# Altium PCB IMU.PcbDoc
Units mil, origin at the board's own origin, x right, y up, seen from the top; angles counter-clockwise.
Board outline 610 x 635 mil, 4 copper layers (Top Layer, GND, Signal Layer, Bottom Layer), stack 30.634 mil thick; 7 components, 10 nets, 36 pads, 10 vias.
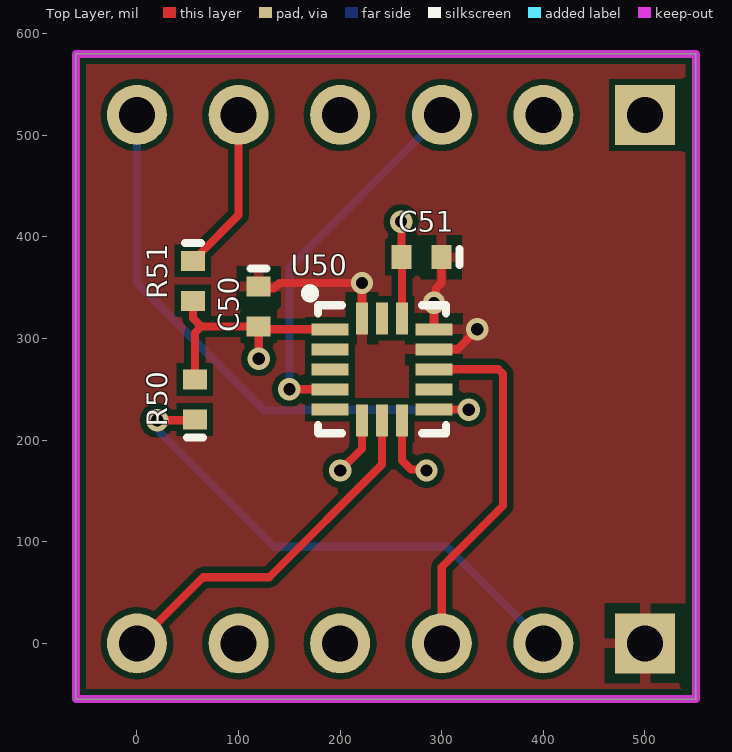
[diagram p0: Top Layer view]
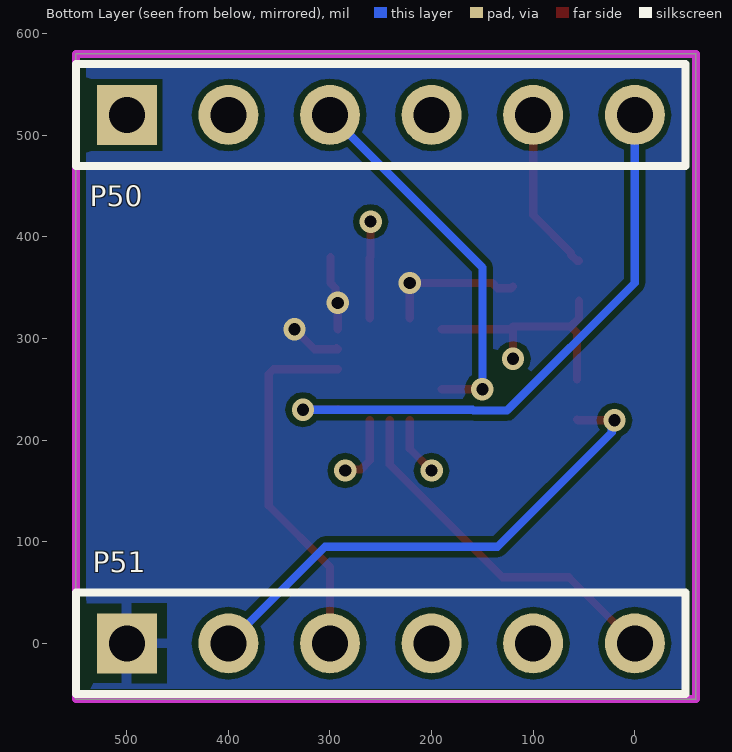
[diagram p1: Bottom Layer view, seen from below]
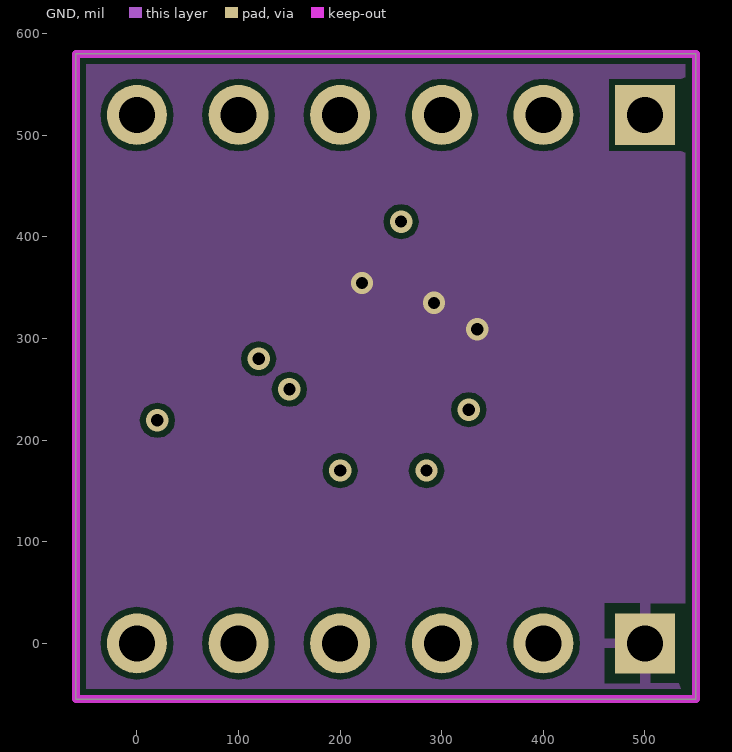
[diagram p2: GND]
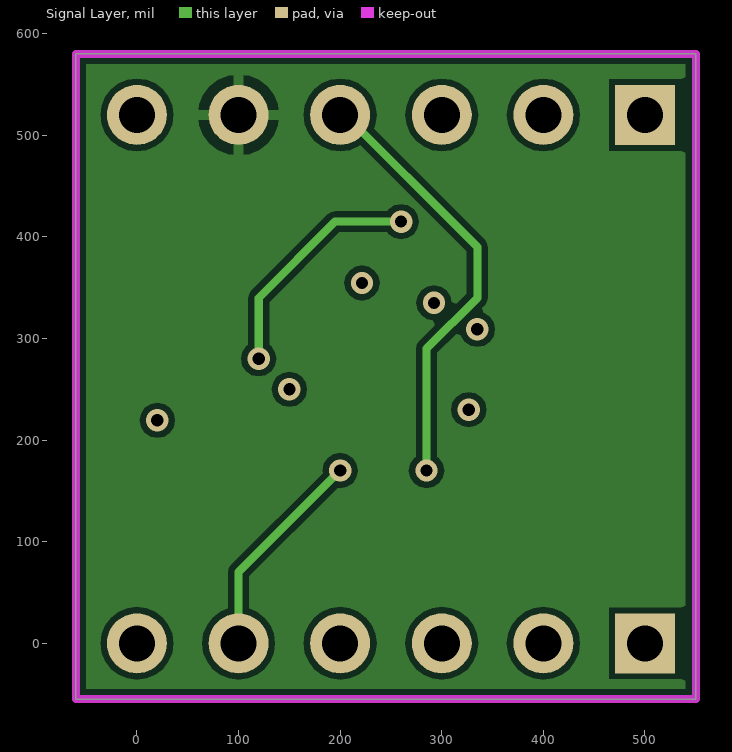
[diagram p3: Signal Layer]

## Layer stack, top to bottom
Top Solder: solder mask 0.4, Solder Resist, Dk 3.5
Top Layer: signal copper 1.4
Dielectric 1: core 10, FR-4, Dk 4.2
GND: signal copper 1.417
Dielectric 3: prepreg 5, Dk 4.2
Signal Layer: signal copper 1.417
Dielectric 2: core 10, Dk 4.2
Bottom Layer: signal copper 1.4
Bottom Solder: solder mask 0.4, Solder Resist, Dk 3.5

## Board outline
-60,-55 -60,580 550,580 550,-55

## Design rules (kind name [scope] priority, off if disabled: settings)
Clearance [All] p1: gap=6 ignorepadtopadclearanceinfootprint=FALSE
MinimumSolderMaskSliver [All] p1: minsoldermaskwidth=0
PolygonConnect [All] p1: thpad.connectstyle=Relief thpad.reliefconductorwidth=10 thpad.reliefentries=4 thpad.polygonreliefangle="90 Angle" thpad.airgapwidth=10 smdpad.connectstyle=Relief smdpad.reliefconductorwidth=10 smdpad.reliefentries=4 smdpad.polygonreliefangle="90 Angle" smdpad.airgapwidth=10 via.connectstyle=Direct via.reliefconductorwidth=10 via.reliefentries=4 via.polygonreliefangle="90 Angle" via.airgapwidth=10
RoomDefinition IMU [InComponentClass('IMU')] p1 off: confinementstyle=ConfineIn formatcopy=TRUE lockcomponents=FALSE outline 41.06,-68.94 41.06,658.94 568.94,658.94 568.94,-68.94
RoutingVias [All] p1: holewidth=9.84 width=19.68 viastyle="Through Hole" minholewidth=7.87 minwidth=17.72 maxholewidth=19.68 maxwidth=39.37
SilkToSilkClearance [All] p1: silktosilkclearance=0
SilkToSolderMaskClearance [IsPad] p1: minsilkscreentomaskgap=0 clearancetoexposedcopper=TRUE
SolderMaskExpansion [All] p1: expansion=4 istentingtop=FALSE
SupplyNets "Schematic Supply Nets_2" [InNet('VREG')] p1: voltage=0.000
SupplyNets "Schematic Supply Nets_1" [InNet('GND')] p2: voltage=0.000
SupplyNets "Schematic Supply Nets" [InNet('VDD')] p3: voltage=0.000
Width [All] p1: maxlimit=10 minlimit=6 preferedwidth=8 minimp=50.000000 maximp=50.000000 favimp=50.000000
27 further rules are at their usual default settings.

## Components (designator, comment, footprint, x,y, rotation, side; value= is the part's Value field where it differs from the comment)
C50 "Generic ceramic capacitor" 0402 119.83,331.47 r270 top value=0.1uF
C51 "Generic ceramic capacitor" 0402 280,380 r180 top value=0.1uF
P50 "Header 6" HDR1X6 500,520 r180 bottom
P51 "Header 6" HDR1X6 500,0 r180 bottom
R50 "Generic resistor" 0402 56.97,240 r90 top value=0
R51 "Generic resistor" 0402 55,356.79 r270 top value=DNP
U50 "ADXL362" ADXL362 241.18,269.68 r0 top

## Footprints (in the part's own frame and the unit in brackets; to place one, negate y for a bottom-side part, rotate by r counter-clockwise, add the part's x,y. Pads: shape width x height; smd on the part's side, far side on the other; paste and mask are expansions set on the pad)
0402 [mm] "Surface Mount; Body 1 x 0.5 mm (LxW typ)"
  rect 0.5x0.6 smd: 1(-0.5,0) 2(0.5,0)
  silkscreen extent -0.95,-0.2 -0.95,0.2, body extent -0.5,-0.25 0.5,0.25, height 0.5
ADXL362 [mm]
  rect 0.925x0.3 smd: 1(-1.3,1) 2(-1.3,0.5) 3(-1.3,0) 4(-1.3,-0.5) 5(-1.3,-1) 9(1.3,-1) 10(1.3,-0.5) 11(1.3,0) 12(1.3,0.5) 13(1.3,1)
  rect 0.3x0.8 smd: 6(-0.5,-1.275) 7(0,-1.275) 8(0.5,-1.275) 14(0.5,1.275) 15(0,1.275) 16(-0.5,1.275)
  silkscreen extent -1.9,-1.6 1.6,2, body extent -1.5,-1.5 1.5,1.5, height 1.14
HDR1X6 [mm] "Connector; Header; 6 Position"
  rect 1.5x1.5 hole 0.9: 1(0,0)
  round 1.5 hole 0.9: 2(2.54,0) 3(5.08,0) 4(7.62,0) 5(10.16,0) 6(12.7,0)
  silkscreen extent -1.27,-1.27 13.97,1.27

## Part data
C50 C51: library part C-0.1uF-10V-X5R-0402, "CAP CER 100nF/0.1UF 10V X5R 0402", Digi-Key Part Number=1276-1022-1-ND, Manufacturer="Samsung Electro-Mechanics", Manufacturer Part Number=CL05A104KP5NNNC, Rating="10V, -55C~85C", Tolerance=+-10%
P50 P51: "Header, 6-Pin", LatestRevisionDate=17-Jul-2002, LatestRevisionNote="Re-released for DXP Platform.", Publisher="Altium Limited"
R50: library part R-0-0.063W-*-0402, "RES 0 OHM JUMPER 1/16W 0402", Digi-Key Part Number=311-0.0JRCT-ND, Manufacturer=YAGEO, Manufacturer Part Number=RC0402JR-070RL, Rating=1/16W
R51: library part res, "Chip Resistor (Surface Mount)"
U50: "Analog Devices low power accelerometer", Digi-Key Part Number=505-ADXL362BCCZ-RLCT-ND, Manufacturer="Analog Devices Inc.", Manufacturer Part Number=ADXL362BCCZ-RL, Rating="1.6~3.5V, -40~85C"

## Via types
v1: diameter 22, hole 12, Top Layer to Bottom Layer, tented both sides, 10 vias

## Nets (pads, with @x,y where several pads share a name; then routed paths per layer and width w, separated by ;. In a path a pad name is that pad's centre, name@x,y a point inside that pad or via, vN(x,y) a via of type N, cw(c..) or ccw(c..) an arc to the next point about the centre after c; other vN are vias at no path point)
CS: P50.4 U50.8 | length 506.5
  Top Layer w8: U50.8 260.87,180 269.67,171.2 283.8,171.2 v1(285,170)
  Signal Layer w8: P50.4@195,530 335,390 335,340 285,290 v1(285,170)
GND: C50.1 C51.1 P51.1 U50.12 U50.13 U50.16 | length 265.6
  Top Layer w8: C50.1 121.56,349.42 135,349.42 140.22,354.64 v1(221.5,354.64) U50.16 ; U50.13 v1(292.36,335) 294.47,337.1 294.47,349.42 299.69,354.64 C51.1 ; U50.12@293.43,290.44 U50.12 315.31,289.37 v1(335,309.06)
INT1: P51.3 U50.11 | length 359.9
  Top Layer w8: U50.11 355.63,269.69 360.31,265 360.31,135.32 300,75 P51.3
INT2: P50.6 U50.9 | length 578.7
  Top Layer w8: U50.9 292.57,230.11 326.37,230.11 v1(326.58,229.9)
  Bottom Layer w8: P50.6 0,354.64 125.64,229 158.7,229 159.6,229.9 v1(326.58,229.9)
MISO: P51.6 U50.7 | length 357.6
  Top Layer w8: P51.6 65,65 130.22,65 241.18,175.96 U50.7
MOSI: P51.5 U50.6 | length 269.8
  Top Layer w8: v1(200,170) 221.5,191.5 U50.6
  Signal Layer w8: P51.5 100,70 v1(200,170)
NetC50_2: C50.2 C51.2 R50.2 R51.2 U50.1 U50.14 | length 569.7
  Top Layer w8: R51.2 55,319.88 63.1,311.78 ; R50.2 56.97,305.65 63.1,311.78 ; v1(119.83,280) C50.2 ; U50.1 122.55,309.06 C50.2 ; v1(260,415) 260.31,414.69 C51.2 260.87,379.45 U50.14 ; 63.1,311.78 C50.2
  Signal Layer w8: v1(119.83,280) 119.83,339.83 195,415 v1(260,415)
SCLK: P50.3 U50.4 | length 372.1
  Top Layer w8: v1(150,250) U50.4
  Bottom Layer w8: v1(150,250) 150,370 P50.3
VDD: P50.5 R51.1 | length 163.3
  Top Layer w8: R51.1 56.97,376.47 62.81,382.32 62.81,384.29 100,421.48 P50.5
VREG: P51.2 R50.1 | length 513.8
  Top Layer w8: v1(20,219.49) 56.14,219.49 R50.1
  Bottom Layer w8: v1(20,219.49) 22.68,216.81 22.68,207.32 135,95 305,95 P51.2
pads on no net: P50.1 P50.2 P51.4 U50.2 U50.3 U50.5 U50.10 U50.15

## Polygon pours and split planes (outlines as drawn)
GND on GND "GND-GND" (solid, pour order 4): 555,580 -60,580 -60,-55 555,-55
VDD on Signal Layer "Signal Layer-GND" (solid, pour order 6): 550,580 -60,580 -60,-55 550,-55
GND on Bottom Layer "Bottom Layer-GND" (solid, pour order 8): 550.13,580.61 550.13,-54.39 -64.87,-54.39 -64.87,580.61
GND on Top Layer "GND_L01_P002" (solid, pour order 2): 555,580 555,-55 -60,-55 -60,580

## Keep-outs
Keep-Out Layer:
  the board outline again, w7.87

## Silkscreen, mask and mechanical layers (free items; w line width, h text height)
Mechanical 1:
  lines w10: -55,-55 -55,575.11 555,574.13 555,-55 -55,-55